# Altium PCB EEU_PSSHI.PcbDoc
Units mm, origin at the board's own origin, x right, y up, seen from the top; angles counter-clockwise.
Board outline 25.03 x 25.04 mm, 2 copper layers (Top Layer, Bottom Layer); 15 components, 15 nets, 74 pads, 13 vias.
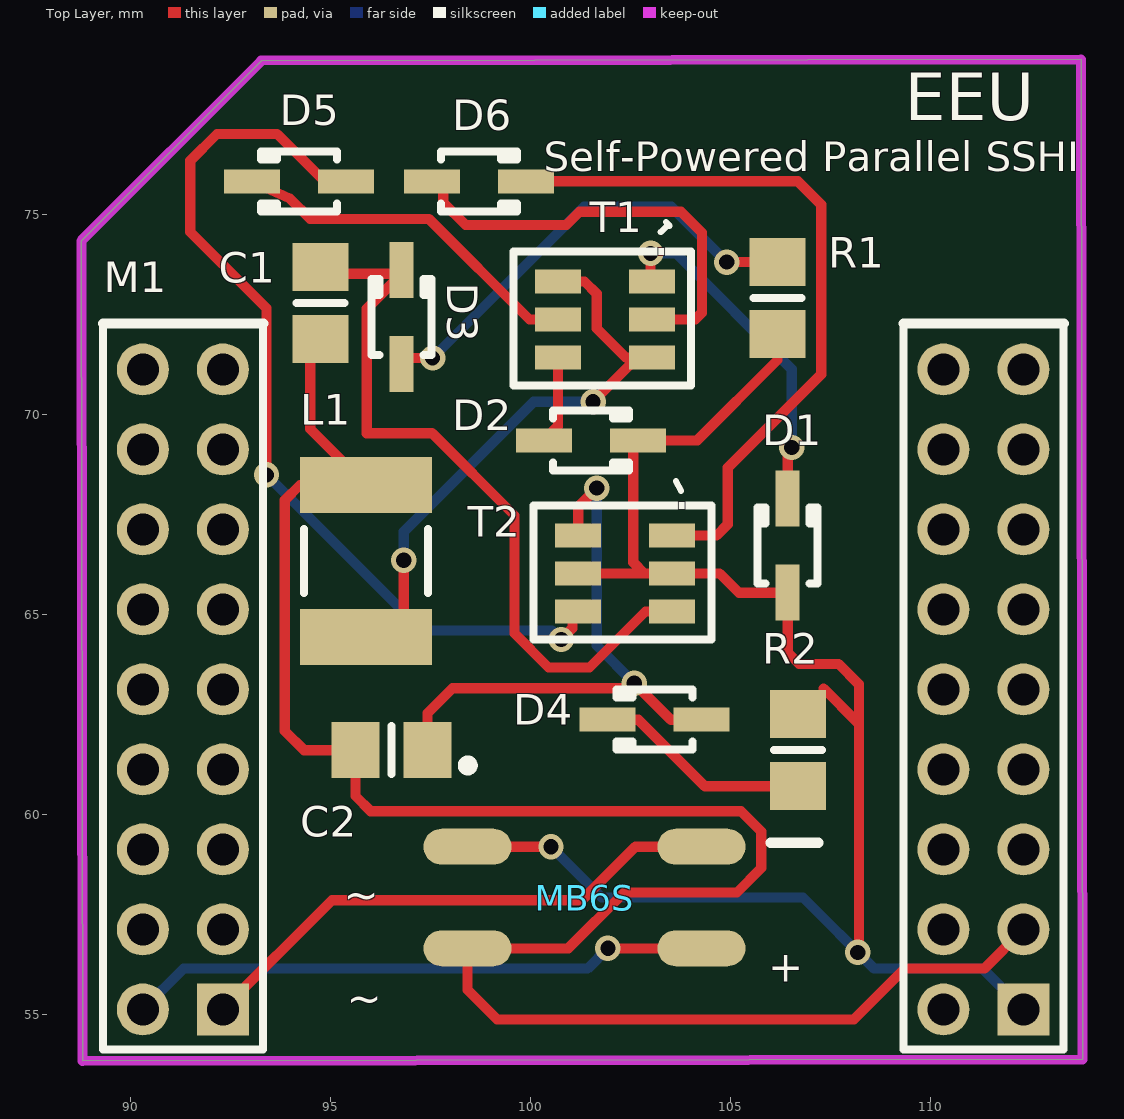
[diagram p0: Top Layer view]
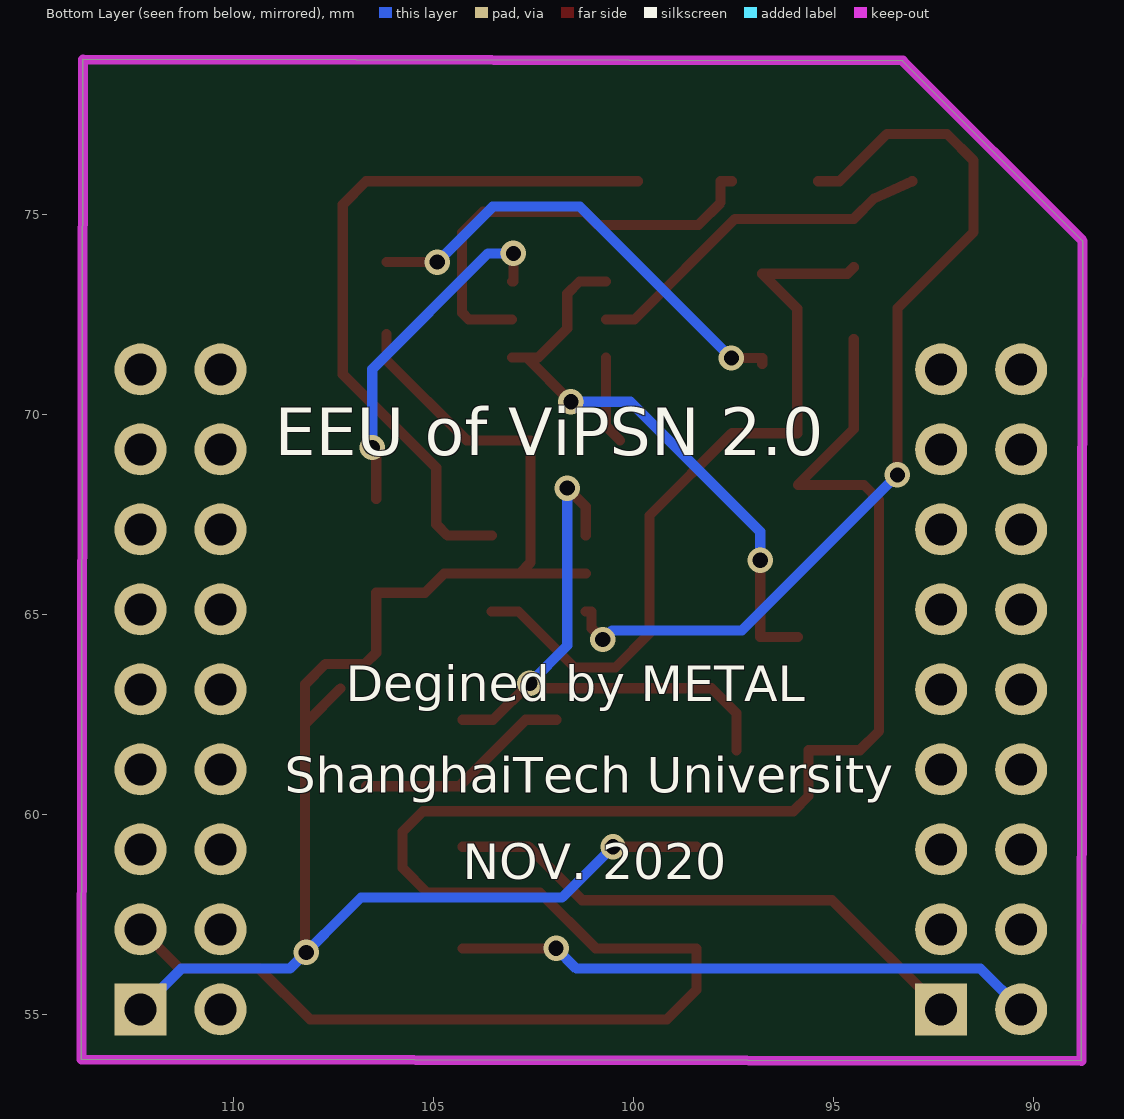
[diagram p1: Bottom Layer view, seen from below]

## Layer stack, top to bottom
Top Layer: signal copper 0.0356
Dielectric: dielectric 0.32, FR-4, Dk 4.8
Bottom Layer: signal copper 0.0356

## Board outline
88.798,53.828 88.766,74.328 93.266,78.828 93.259,78.835 113.759,78.867 113.798,53.867

## Design rules (kind name [scope] priority, off if disabled: settings)
Clearance [All] p1: gap=0.178
PolygonConnect [All] p1: connectstyle=Relief reliefconductorwidth=0.254 reliefentries=4 polygonreliefangle="90 Angle"
RoutingVias [All] p1: holewidth=0.381 width=0.635 viastyle="Through Hole" minholewidth=0.381 minwidth=0.635 maxholewidth=0.381 maxwidth=0.635
SilkscreenOverComponentPads SilkToSolderMaskClearance [IsPad] p1: minsilkscreentomaskgap=0.254
SolderMaskExpansion [All] p1: expansion=0.102
Width [All] p1: maxlimit=0.254 minlimit=0.254 preferedwidth=0.254
27 further rules are at their usual default settings.

## Components (designator, comment, footprint, x,y, rotation, side; value= is the part's Value field where it differs from the comment)
C1 "CAP" 6-0805_N 94.742,72.771 r90 top
C2 "CAP" 6-0805_N 96.52,61.595 r0 top
D1 "SS14" SS16 106.426,65.532 r90 top
D2 "SS14" SS16 100.33,69.342 r0 top
D3 "SS14" SS16 96.774,71.247 r90 top
D4 "SS14" SS16 104.267,62.357 r180 top
D5 "SS14" SS16 95.377,75.819 r180 top
D6 "SS16" SS16 97.536,75.819 r0 top
L1 "1mH" 1812 95.885,66.327 r270 top
M1 "MHDR2X18" module9x4 112.293,71.118 r180 top
MB6S "Header 2X2" MB6S 101.346,57.912 r0 top
R1 "Res1" 6-0805_N 106.172,72.898 r270 top
R2 "Res1" 6-0805_N 106.68,61.595 r90 top
T1 "XN4601" XN4601 102.997,71.374 r180 top
T2 "XN4601" XN4601 103.505,65.024 r180 top

## Footprints (in the part's own frame and the unit in brackets; to place one, negate y for a bottom-side part, rotate by r counter-clockwise, add the part's x,y. Pads: shape width x height; smd on the part's side, far side on the other; paste and mask are expansions set on the pad)
6-0805_N [mm] "Chip Resistor, Body 2.0x1.2mm, IPC Medium Density"
  rect 1.2x1.4 smd: 1(-0.9,0) 2(0.9,0)
  silkscreen extent 0,-0.6 0,0.6, body extent -1.07,-0.7 1.07,0.7, height 0.7
1812 [mm] "Chip Capacitor, Body 4.5x3.2mm, IPC High Density"
  rect 1.4x3.3 smd: 1(-1.9,0) 2(1.9,0)
  silkscreen extent -0.8,-1.55 0.8,1.55, body extent -2.4,-1.7 2.4,1.7, height 1.4
MB6S [mm] "SOP127P600-8N"
  oval 2.2x0.9 smd: 1(-2.925,1.27) 2(2.925,1.27) 3(-2.925,-1.27) 4(2.925,-1.27)
  silkscreen extent -3.04,1.37 5.84,3.43, body extent -2.05,-2.47 2.05,2.47, height 2.9
module9x4 [mm]
  rect 1.3x1.3 hole 0.8: 1(-0.025,16.002) 36(19.99,16.002)
  round 1.3 hole 0.8: 2(21.99,16.002) 3(-0.025,14.002) 4(21.99,14.002) 5(-0.025,12.002) 6(21.99,12.002) 7(-0.025,10.002) 8(21.99,10.002) 9(-0.025,8.002) 10(21.99,8.002) 11(-0.025,6.002) 12(21.99,6.002) 13(-0.025,4.002) 14(21.99,4.002) 15(-0.025,2.002) 16(21.99,2.002) 17(-0.025,0.002) 18(21.99,0.002) 19(1.975,0.002) 20(19.99,0.002) 21(1.975,2.002) 22(19.99,2.002) 23(1.975,4.002) 24(19.99,4.002) 25(1.975,6.002) 26(19.99,6.002) 27(1.975,8.002) 28(19.99,8.002) 29(1.975,10.002) 30(19.99,10.002) 31(1.975,12.002) 32(19.99,12.002) 33(1.975,14.002) 34(19.99,14.002) 35(1.975,16.002)
  silkscreen extent -1.04,-1.14 22.99,17
SS16 [mm]
  rect 1.4x0.6 smd: 1(0,0) 2(2.35,0)
  silkscreen extent 0.22,-0.75 2.13,0.75, body extent -0.17,-0.67 2.43,0.63, height 1
XN4601 [mm]
  rect 1.15x0.6 smd: 1(-0.032,-1.941) 2(-0.032,-0.991) 3(-0.032,-0.041) 4(2.318,-0.041) 5(2.318,-0.991) 6(2.318,-1.941)
  silkscreen extent -1.02,-2.69 3.43,0.66, body extent 0.27,-2.54 2.02,0.56, height 1.3

## Part data
C1 C2: "Capacitor"
D1 D2 D3 D4 D5 D6: library part "Diode 1N4004", "1 Amp General Purpose Rectifier"
L1: library part INDUCTOR
M1: "Header, 18-Pin, Dual row"
MB6S: "Header, 2-Pin, Dual row"
R1 R2: "Resistor"
T1 T2: "Composite Transistors"

## Via types
v1: diameter 0.635, hole 0.381, Top Layer to Bottom Layer, 13 vias

## Nets (pads, with @x,y where several pads share a name; then routed paths per layer and width w, separated by ;. In a path a pad name is that pad's centre, name@x,y a point inside that pad or via, vN(x,y) a via of type N, cw(c..) or ccw(c..) an arc to the next point about the centre after c; other vN are vias at no path point)
GND: M1.36 MB6S.2 | length 13.7
  Top Layer w0.254: M1.36 95.03,57.843 101.277,57.843 102.616,59.182 MB6S.2
NetC1_2: C1.2 D3.2 T2.3 | length 19.1
  Top Layer w0.254: C1.2@94.488,73.671 94.651,73.508 96.774,73.508 95.899,72.633 95.899,69.52 97.536,69.52 99.593,67.462 99.593,64.516 100.444,63.665 101.469,63.665 102.868,65.065 T2.3
NetC2_2: C2.2 D4.1 T2.6 | length 15.2
  Top Layer w0.254: C2.2 97.42,62.52 98.044,63.144 102.591,63.144 v1(102.591,63.271) 103.505,62.357 D4.1 ; T2.6 101.187,67.684 v1(101.651,68.148)
  Bottom Layer w0.254: v1(101.651,68.148) 101.651,64.211 v1(102.591,63.271)
NetD1_2: D1.2 T1.1 | length 8.7
  Top Layer w0.254: v1(102.997,74.016) 102.997,73.315 T1.1 ; D1.2 106.426,69.063 v1(106.528,69.164)
  Bottom Layer w0.254: v1(102.997,74.016) 103.632,74.016 106.528,71.12 v1(106.528,69.164)
NetD2_1: D2.1 T1.4 | length 2.2
  Top Layer w0.254: D2.1 100.679,69.691 T1.4
NetD3_1: D3.1 R1.1 | length 11.7
  Top Layer w0.254: D3.1 96.774,71.399 v1(97.547,71.399) ; v1(104.902,73.798) R1.1
  Bottom Layer w0.254: v1(97.547,71.399) 101.332,75.184 103.516,75.184 v1(104.902,73.798)
NetD4_2: D4.2 R2.1 | length 5.5
  Top Layer w0.254: D4.2 102.692,62.357 104.354,60.695 R2.1
NetD5_1: D5.1 T2.4 | length 23.3
  Top Layer w0.254: v1(93.396,68.478) 93.396,72.643 91.49,74.549 91.49,76.333 92.159,77.002 93.661,77.002 94.844,75.819 D5.1 ; v1(100.762,64.364) 101.041,64.643 101.041,65.065 T2.4
  Bottom Layer w0.254: v1(93.396,68.478) 97.282,64.592 100.533,64.592 v1(100.762,64.364)
NetD5_2: D5.2 T1.5 | length 9
  Top Layer w0.254: D5.2 93.98,75.387 94.488,74.879 97.455,74.879 99.97,72.365 T1.5
NetD6_1: D6.1 T1.2 | length 11.2
  Top Layer w0.254: D6.1 97.815,75.819 97.815,75.286 98.374,74.727 100.889,74.727 101.219,75.057 103.759,75.057 104.28,74.536 104.28,72.53 104.115,72.365 T1.2
NetD6_2: D6.2 T2.1 | length 18.1
  Top Layer w0.254: D6.2 106.68,75.819 107.264,75.235 107.264,70.993 104.927,68.656 104.927,67.244 104.648,66.965 T2.1
NetL1_2: L1.2 T1.3 T1.6 | length 14.9
  Top Layer w0.254: L1.2 96.825,64.427 v1(96.825,66.345) ; T1.6 101.346,73.315 101.651,73.01 101.651,72.136 102.372,71.415 T1.3@102.667,71.415 ; v1(101.559,70.307) T1.3@102.667,71.415 ; T1.3 T1.3@102.667,71.415
  Bottom Layer w0.254: v1(96.825,66.345) 96.825,67.056 100.076,70.307 v1(101.559,70.307)
PZ1: C1.1 C2.1 L1.1 M1.3 MB6S.3 | length 51.1
  Top Layer w0.254: C1.1@94.488,71.871 94.488,69.624 L1.1 94.234,68.227 93.853,67.846 93.853,62.078 94.336,61.595 C2.1 95.62,60.452 96.001,60.071 105.258,60.071 105.766,59.563 105.766,58.649 105.156,58.039 102.337,58.039 100.94,56.642 MB6S.3 98.421,55.605 99.162,54.864 108.077,54.864 109.347,56.134 111.337,56.134 M1.3
PZ2: D1.1 D2.2 M1.1 MB6S.1 R1.2 R2.2 T2.2 T2.5 | length 41.1
  Top Layer w0.254: MB6S.1 v1(100.508,59.182) ; T2.5 102.845,66.015 ; R1.2 106.172,71.349 104.165,69.342 D2.2 102.565,69.342 102.565,66.294 102.845,66.015 ; 107.322,63.137 108.179,62.281 ; v1@108.204,56.515 108.204,63.246 107.696,63.754 106.705,63.754 106.426,64.033 D1.1 105.207,65.532 104.724,66.015 T2.2 102.845,66.015
  Bottom Layer w0.254: v1(100.508,59.182) 101.778,57.912 106.807,57.912 108.585,56.134 111.301,56.134 M1.1
  other v1: 108.179,56.54
VSTO: M1.2 MB6S.4 | length 14.6
  Top Layer w0.254: v1(101.93,56.642) MB6S.4
  Bottom Layer w0.254: M1.2 91.321,56.134 101.422,56.134 v1(101.93,56.642)
pads on no net: M1.4 M1.5 M1.6 M1.7 M1.8 M1.9 M1.10 M1.11 M1.12 M1.13 M1.14 M1.15 M1.16 M1.17 M1.18 M1.19 M1.20 M1.21 M1.22 M1.23 M1.24 M1.25 M1.26 M1.27 M1.28 M1.29 M1.30 M1.31 M1.32 M1.33 M1.34 M1.35

## Keep-outs
Keep-Out Layer:
  lines w0.254: 93.259,78.835 113.759,78.867 113.798,53.867 88.798,53.828 88.766,74.328 93.266,78.828

## Silkscreen, mask and mechanical layers (free items; w line width, h text height)
Top Overlay:
  lines w0.152: 103.251,74.549 103.408,74.706 103.475,74.706 103.378,74.803 ; 103.632,68.326 103.759,68.072 103.632,68.326
  text "EEU" at 109.347,76.962 h2.03
  text "Self-Powered Parallel SSHI" at 100.33,75.819 h1.27
Bottom Overlay:
  text "EEU of ViPSN 2.0" at 108.966,68.58 h2.03
  text "Degined by METAL" at 107.188,62.517 h1.52
  text "ShanghaiTech University" at 108.712,60.231 h1.52
  text "NOV. 2020" at 104.267,58.072 h1.52

## Text inside footprints (layer, text, board x,y; h text height)
MB6S: Top Overlay "+" at 105.943,55.804 h0.76; Top Overlay "~" at 95.326,57.607 h0.76; Top Overlay "~" at 95.402,55.016 h0.76